# EAGLE board motherboard (EAGLE 6.1)
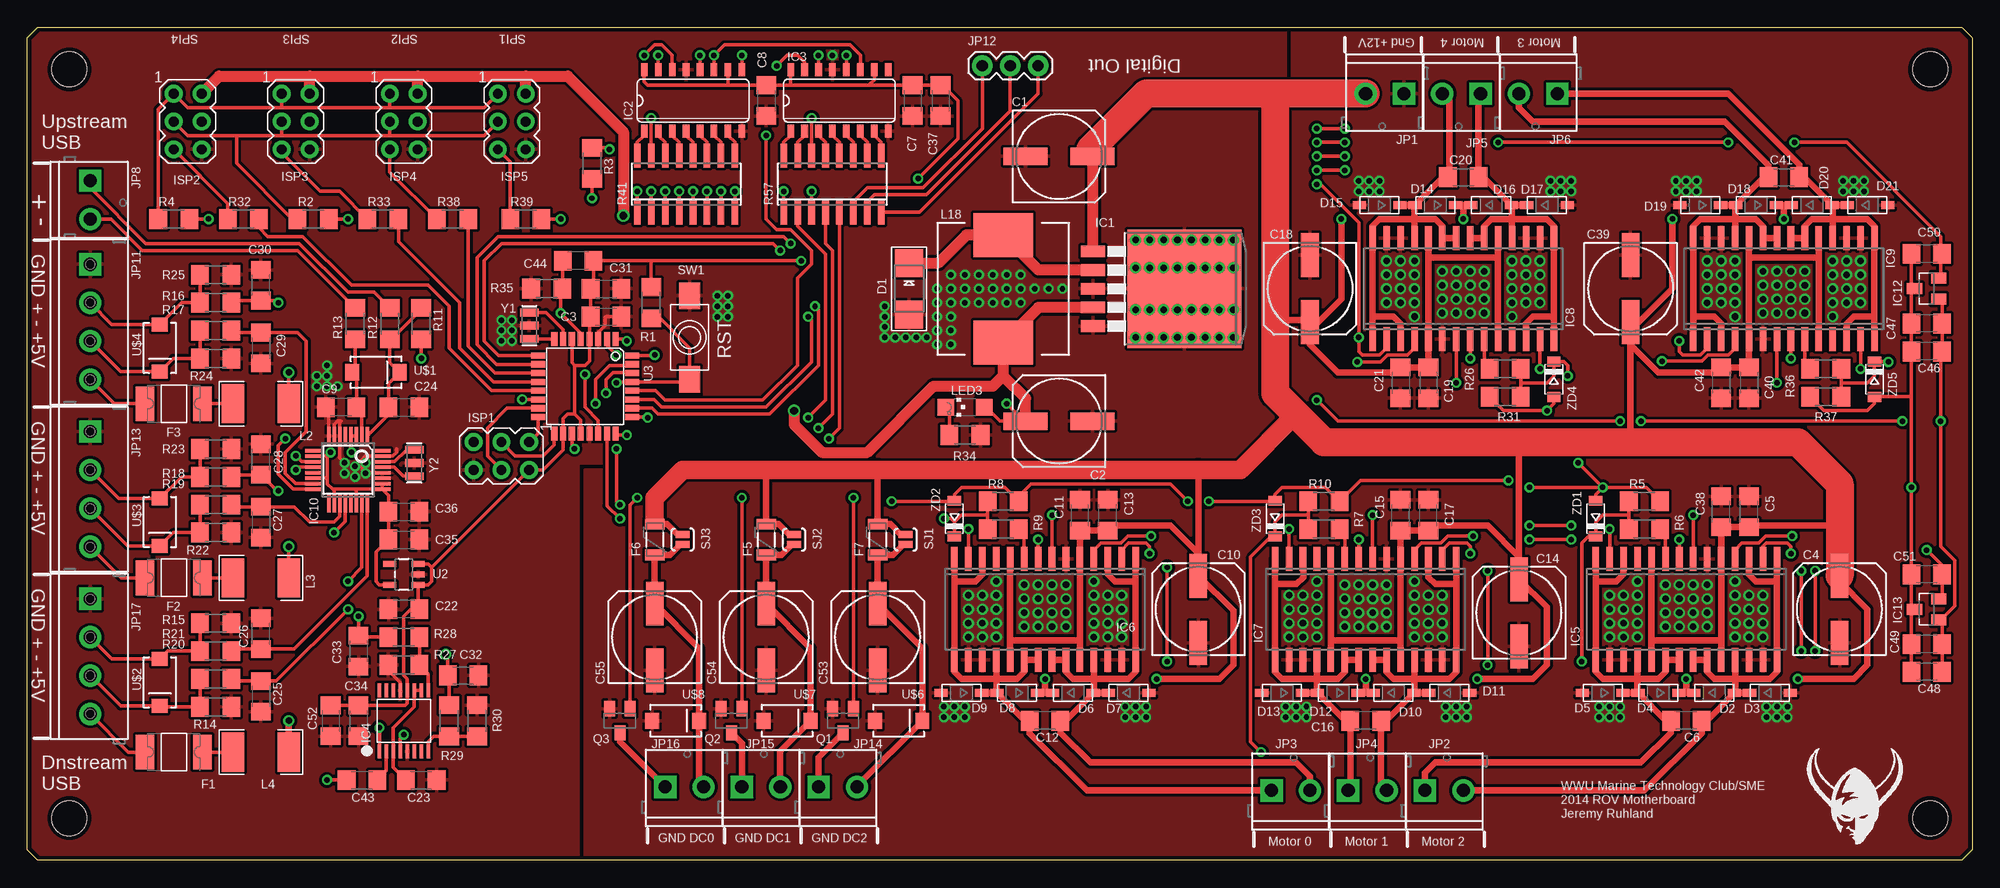
[diagram p0: board, top side]
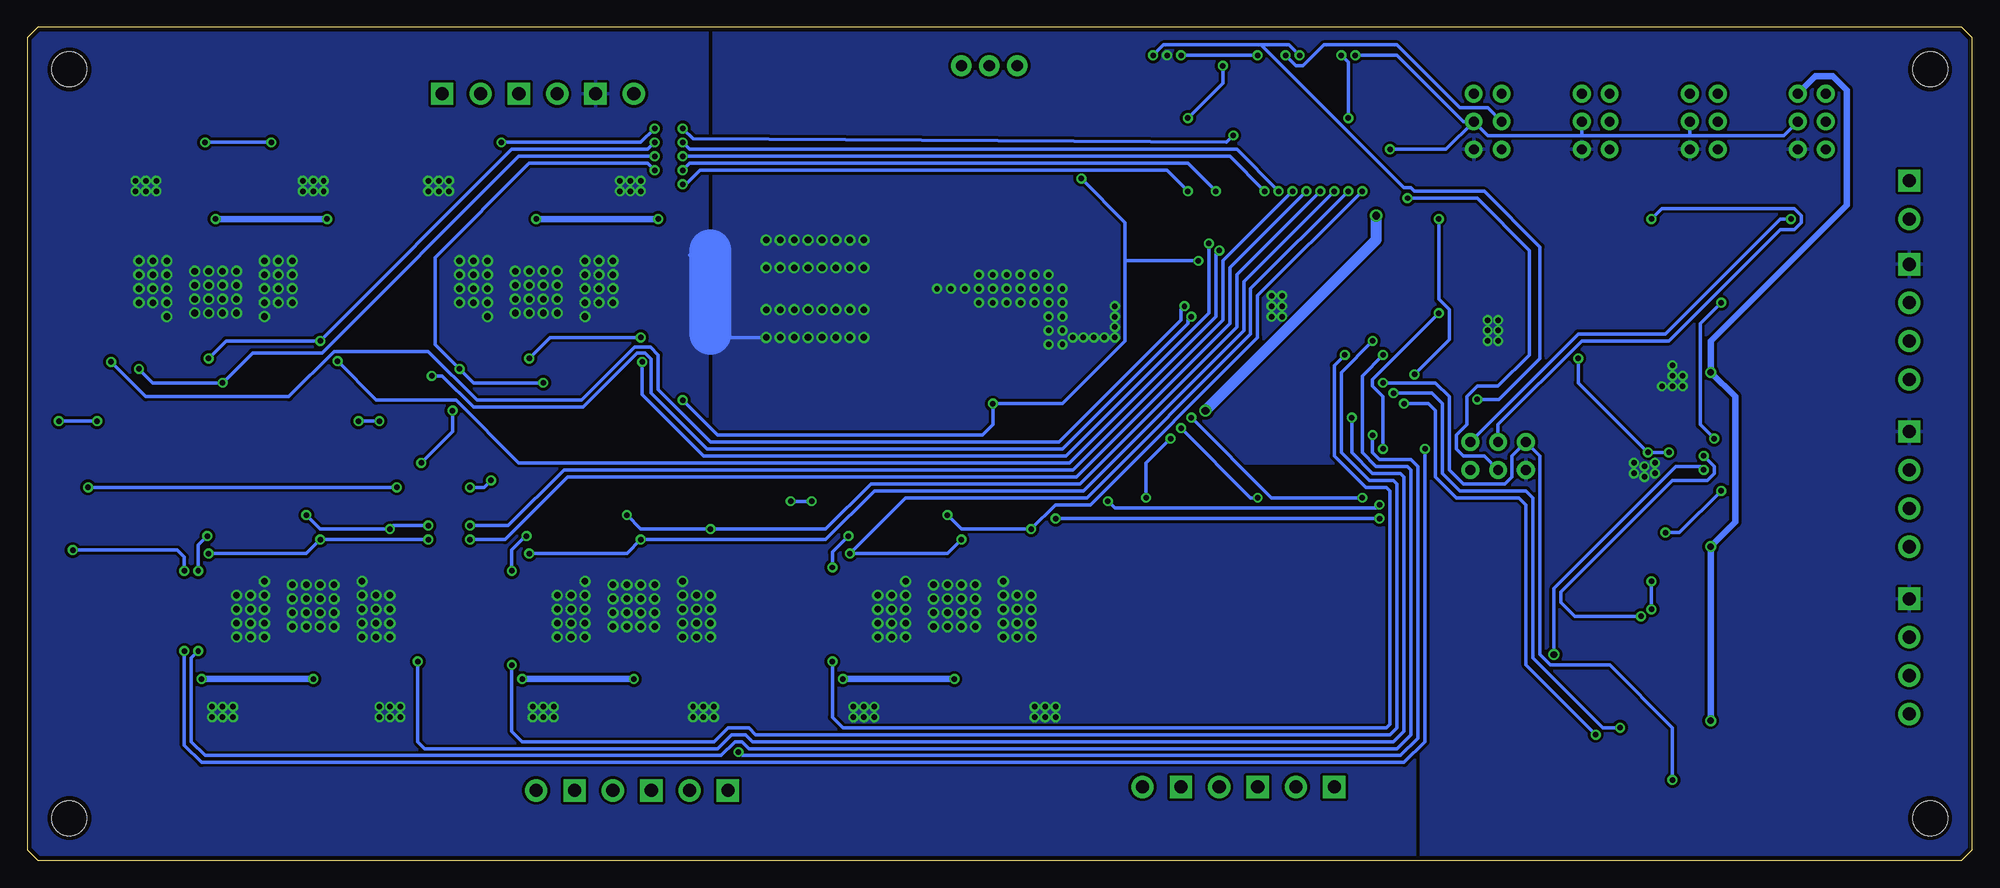
[diagram p1: board, bottom side, seen from below]

Size 177.16 x 75.88 mm. Coordinates in mm from the lower left corner, seen from the top.
Outline: 0,0.95 0,74.93 0.95,75.88 176.21,75.88 177.16,74.93 177.16,0.95 176.21,0 0.95,0 0,0.95
Copper layers (1*16): Top 0.035559375mm / dielectric 1.501140625mm / Bottom 0.035559375mm
Design rules: minimum track width 10mil, minimum drill 15mil, track to track 6mil, track to pad 6mil, pad to pad 6mil, via to via 6mil, smd to smd 6mil, copper to edge 15mil, drill to drill 8mil, minimum pad ring 10mil, minimum via ring 8mil, stop-mask expansion 4mil, vias tented up to drill 0mil, thermal gap 10mil
Holes 3.2 mm at 3.81,3.81 173.35,3.81 3.81,72.07 173.35,72.07

## Footprints (pad centres in the part's own frame; a part is rotated, then mirrored left to right if it is on the bottom)
153CLV-0807 = smd 4 x 1.6: + 3.05,0; - -3.05,0
C1206 = smd 1.6 x 1.8: 1 -1.4,0; 2 1.4,0
SMADIODE = smd 2.54 x 2.54: A 2.349,0; C -2.349,0
SOD-123 = smd 1.2 x 0.7: A 1.85,0; C -1.85,0
PTC1812L = smd 1.7 x 3.15: 1 -2.62,0; 2 2.62,0
PTC-1206 = smd 1 x 1.8: 1 -1.4,0; 2 1.4,0
TO263-5 = smd 1.067 x 2.159: 1 -3.404,-5.791; 2 -1.702,-5.791; 3 0,-5.791; 4 1.702,-5.791; 5 3.404,-5.791 | smd 10.8 x 10.41: 6 0,2.54
SO16 = smd 0.6 x 1.2: 1 -4.445,-2.8; 2 -3.175,-2.8; 3 -1.905,-2.8; 4 -0.635,-2.8; 5 0.635,-2.8; 6 1.905,-2.8; 7 3.175,-2.8; 8 4.445,-2.8; 9 4.445,2.8; 10 3.175,2.8; 11 1.905,2.8; 12 0.635,2.8; 13 -0.635,2.8; 14 -1.905,2.8; 15 -3.175,2.8; 16 -4.445,2.8
SSOP-16-FTDI = smd 0.32 x 1.26: 1 -2.223,-2.779; 2 -1.588,-2.779; 3 -0.953,-2.779; 4 -0.318,-2.779; 5 0.317,-2.779; 6 0.952,-2.779; 7 1.587,-2.779; 8 2.222,-2.779; 9 2.222,2.779; 10 1.587,2.779; 11 0.952,2.779; 12 0.317,2.779; 13 -0.318,2.779; 14 -0.953,2.779; 15 -1.588,2.779; 16 -2.223,2.779
SO-28 = smd 0.6 x 2.2: 1 -8.255,-4.6; 2 -6.985,-4.6; 3 -5.715,-4.6; 4 -4.445,-4.6; 5 -3.175,-4.6; 6 -1.905,-4.6; 7 -0.635,-4.6; 8 0.635,-4.6; 9 1.905,-4.6; 10 3.175,-4.6; 11 4.445,-4.6; 12 5.715,-4.6; 13 6.985,-4.6; 14 8.255,-4.6; 15 8.255,4.6; 16 6.985,4.6; 17 5.715,4.6; 18 4.445,4.6; 19 3.175,4.6; 20 1.905,4.6; 21 0.635,4.6; 22 -0.635,4.6; 23 -1.905,4.6; 24 -3.175,4.6; 25 -4.445,4.6; 26 -5.715,4.6; 27 -6.985,4.6; 28 -8.255,4.6
LQFP-32 = smd 0.3 x 1.6: 1 -1.75,-3.1; 2 -1.25,-3.1; 3 -0.75,-3.1; 4 -0.25,-3.1; 5 0.25,-3.1; 6 0.75,-3.1; 7 1.25,-3.1; 8 1.75,-3.1; 17 1.75,3.1; 18 1.25,3.1; 19 0.75,3.1; 20 0.25,3.1; 21 -0.25,3.1; 22 -0.75,3.1; 23 -1.25,3.1; 24 -1.75,3.1 | smd 1.6 x 0.3: 9 3.1,-1.75; 10 3.1,-1.25; 11 3.1,-0.75; 12 3.1,-0.25; 13 3.1,0.25; 14 3.1,0.75; 15 3.1,1.25; 16 3.1,1.75; 25 -3.1,1.75; 26 -3.1,1.25; 27 -3.1,0.75; 28 -3.1,0.25; 29 -3.1,-0.25; 30 -3.1,-0.75; 31 -3.1,-1.25; 32 -3.1,-1.75
SOT23 = smd 1 x 1.4: 1 -0.95,-1.1; 2 0.95,-1.1; 3 0,1.1
AVRISP = drill 0.9 pad 1.626: 1 -1.27,2.54; 2 1.27,2.54; 3 -1.27,0; 4 1.27,0; 5 -1.27,-2.54; 6 1.27,-2.54
SCREWTERMINAL-3.5MM-2 = drill 1.2 pad 2.032 square: 1 0,0 | drill 1.2 pad 2.032: 2 3.5,0
SCREWTERMINAL-3.5MM-4 = drill 1.2 pad 2.032 square: 1 0,0 | drill 1.2 pad 2.032: 2 3.5,0; 3 7,0; 4 10.5,0
1X03 = drill 1.016 pad 1.88: 1 0,0; 2 2.54,0; 3 5.08,0
INDUCTOR-1206 = smd 2.032 x 3.556: P$1 -2.54,0; P$2 2.54,0
CDRH125 = smd 5.4 x 4: 1 0,4.9; 2 0,-4.9
CHIPLED_1206 = smd 1.5 x 1.5: A 0,-1.75; C 0,1.75
R1206 = smd 1.6 x 1.803: 1 -1.422,0; 2 1.422,0
SO16' = smd 0.6 x 2.2: 1 -4.445,-2.6; 2 -3.175,-2.6; 3 -1.905,-2.6; 4 -0.635,-2.6; 5 0.635,-2.6; 6 1.905,-2.6; 7 3.175,-2.6; 8 4.445,-2.6; 9 4.445,2.6; 10 3.175,2.6; 11 1.905,2.6; 12 0.635,2.6; 13 -0.635,2.6; 14 -1.905,2.6; 15 -3.175,2.6; 16 -4.445,2.6
SJ_2S-NO = smd 0.635 x 1.27: 1 -0.45,0; 2 0.45,0
FSMSM = smd 2.413 x 1.905: A -3.81,0; B 3.81,0
SOT23-5 = smd 0.55 x 1.2: 1 -0.95,-1.3; 2 0,-1.3; 3 0.95,-1.3; 4 0.95,1.3; 5 -0.95,1.3
TQFP32-08 = smd 1.27 x 0.559: 1 -4.293,2.8; 2 -4.293,2; 3 -4.293,1.2; 4 -4.293,0.4; 5 -4.293,-0.4; 6 -4.293,-1.2; 7 -4.293,-2; 8 -4.293,-2.8; 17 4.293,-2.8; 18 4.293,-2; 19 4.293,-1.2; 20 4.293,-0.4; 21 4.293,0.4; 22 4.293,1.2; 23 4.293,2; 24 4.293,2.8 | smd 0.559 x 1.27: 9 -2.8,-4.293; 10 -2,-4.293; 11 -1.2,-4.293; 12 -0.4,-4.293; 13 0.4,-4.293; 14 1.2,-4.293; 15 2,-4.293; 16 2.8,-4.293; 25 2.8,4.293; 26 2,4.293; 27 1.2,4.293; 28 0.4,4.293; 29 -0.4,4.293; 30 -1.2,4.293; 31 -2,4.293; 32 -2.8,4.293
SMA-DIODE = smd 1.27 x 1.47: A -2.15,0; C 2.15,0
RESONATOR-SMD = smd 0.7 x 1.7: 1 -1.2,0; 2 0,0; 3 1.2,0
SOD-123' = smd 0.91 x 1.22: A 1.635,0; C -1.635,0

## Placement (x,y rotation side)
C1  1000uF  [153CLV-0807]  93.98,64.14 0 top
C2  1000uF  [153CLV-0807]  93.98,40.01 180 top
C3  0.1uF  [C1206]  52.7,49.53 0 top
C4  500uF  [153CLV-0807]  165.1,22.86 90 top
C5  0.1uF  [C1206]  156.84,31.75 90 top
C6  1uF  [C1206]  151.13,12.7 180 top
C7  0.1uF  [C1206]  80.64,69.22 270 top
C8  0.1uF  [C1206]  67.31,69.22 270 top
C9  47pF  [C1206]  28.57,41.27 180 top
C10  500uF  [153CLV-0807]  106.68,22.86 90 top
C11  0.1uF  [C1206]  95.89,31.43 90 top
C12  1uF  [C1206]  92.71,12.7 180 top
C13  4.7uF  [C1206]  98.42,31.43 90 top
C14  500uF  [153CLV-0807]  135.89,22.54 90 top
C15  0.1uF  [C1206]  125.09,31.43 90 top
C16  1uF  [C1206]  121.92,12.7 180 top
C17  4.7uF  [C1206]  127.64,31.43 90 top
C18  500uF  [153CLV-0807]  116.84,52.07 270 top
C19  0.1uF  [C1206]  127.64,43.5 270 top
C20  1uF  [C1206]  130.81,62.23 0 top
C21  4.7uF  [C1206]  125.09,43.5 270 top
C22  4.7uF  [C1206]  34.29,22.86 180 top
C23  0.1uF  [C1206]  35.88,7.3 0 top
C24  47pF  [C1206]  34.29,41.27 0 top
C25  47pF  [C1206]  21.27,14.92 270 top
C26  47pF  [C1206]  21.27,20.64 90 top
C27  47pF  [C1206]  21.27,30.8 270 top
C28  47pF  [C1206]  21.27,36.51 90 top
C29  47pF  [C1206]  21.27,46.67 270 top
C30  47pF  [C1206]  21.27,52.39 90 top
C31  4.7uF  [C1206]  52.7,52.07 0 top
C32  47pF  [C1206]  39.69,16.83 0 top
C33  47pF  [C1206]  30.16,19.05 270 top
C34  0.1uF  [C1206]  30.16,12.7 270 top
C35  4.7uF  [C1206]  34.29,29.21 0 top
C36  0.1uF  [C1206]  34.29,31.75 0 top
C37  4.7uF  [C1206]  83.19,69.22 270 top
C38  4.7uF  [C1206]  154.31,31.75 90 top
C39  500uF  [153CLV-0807]  146.05,52.07 270 top
C40  0.1uF  [C1206]  156.84,43.5 270 top
C41  1uF  [C1206]  160.02,62.23 0 top
C42  4.7uF  [C1206]  154.31,43.5 270 top
C43  0.1uF  [C1206]  30.48,7.3 0 top
C44  0.1uF  [C1206]  50.16,54.61 180 top
C46  4.7uF  [C1206]  173.04,46.35 180 top
C47  0.1uF  [C1206]  173.04,48.9 180 top
C48  4.7uF  [C1206]  173.04,17.14 180 top
C49  0.1uF  [C1206]  173.04,19.68 180 top
C50  0.1uF  [C1206]  173.04,55.24 180 top
C51  0.1uF  [C1206]  173.04,26.04 180 top
C52  4.7uF  [C1206]  27.62,12.7 270 top
C53  1000uF  [153CLV-0807]  77.47,20.32 90 top
C54  1000uF  [153CLV-0807]  67.31,20.32 90 top
C55  1000uF  [153CLV-0807]  57.15,20.32 90 top
D1  [SMADIODE]  80.33,52.07 270 top
D2  [SOD-123]  153.67,15.24 0 top
D3  [SOD-123]  158.75,15.24 0 top
D4  [SOD-123]  148.59,15.24 180 top
D5  [SOD-123]  143.51,15.24 180 top
D6  [SOD-123]  95.25,15.24 0 top
D7  [SOD-123]  100.33,15.24 0 top
D8  [SOD-123]  90.17,15.24 180 top
D9  [SOD-123]  85.09,15.24 180 top
D10  [SOD-123]  124.46,15.24 0 top
D11  [SOD-123]  129.54,15.24 0 top
D12  [SOD-123]  119.38,15.24 180 top
D13  [SOD-123]  114.3,15.24 180 top
D14  [SOD-123]  128.27,59.69 180 top
D15  [SOD-123]  123.19,59.69 180 top
D16  [SOD-123]  133.35,59.69 0 top
D17  [SOD-123]  138.43,59.69 0 top
D18  [SOD-123]  157.48,59.69 180 top
D19  [SOD-123]  152.4,59.69 180 top
D20  [SOD-123]  162.56,59.69 0 top
D21  [SOD-123]  167.64,59.69 0 top
F1  500mA  [PTC1812L]  13.34,9.84 180 top
F2  500mA  [PTC1812L]  13.34,25.72 180 top
F3  500mA  [PTC1812L]  13.34,41.59 180 top
F5  PTCSMD  [PTC-1206]  67.31,29.21 90 top
F6  PTCSMD  [PTC-1206]  57.15,29.21 90 top
F7  PTCSMD  [PTC-1206]  77.47,29.21 90 top
IC1  LM2576  [TO263-5]  102.87,52.07 270 top
IC2  74LS595D  [SO16]  60.64,69.22 0 top
IC3  74LS595D  [SO16]  73.98,69.22 0 top
IC4  IC_FT230X-SSOP-16  [SSOP-16-FTDI]  34.29,12.7 0 top
IC5  VN5772AK  [SO-28]  151.13,22.86 180 top
IC6  VN5772AK  [SO-28]  92.71,22.86 180 top
IC7  VN5772AK  [SO-28]  121.92,22.86 180 top
IC8  VN5772AK  [SO-28]  130.81,52.07 0 top
IC9  VN5772AK  [SO-28]  160.02,52.07 0 top
IC10  TUSB2046B  [LQFP-32]  29.21,35.56 180 top
IC12  LM50  [SOT23]  173.04,52.07 90 top
IC13  LM50  [SOT23]  173.04,22.86 90 top
ISP1  AVRISP-6  [AVRISP]  43.18,36.83 270 top
ISP2  AVRISP-6  [AVRISP]  14.61,67.31 0 top
ISP3  AVRISP-6  [AVRISP]  24.45,67.31 0 top
ISP4  AVRISP-6  [AVRISP]  34.29,67.31 0 top
ISP5  AVRISP-6  [AVRISP]  44.13,67.31 0 top
JP1  [SCREWTERMINAL-3.5MM-2]  125.41,69.85 180 top
JP2  [SCREWTERMINAL-3.5MM-2]  127.32,6.35 0 top
JP3  [SCREWTERMINAL-3.5MM-2]  113.35,6.35 0 top
JP4  [SCREWTERMINAL-3.5MM-2]  120.33,6.35 0 top
JP5  [SCREWTERMINAL-3.5MM-2]  132.4,69.85 180 top
JP6  [SCREWTERMINAL-3.5MM-2]  139.38,69.85 180 top
JP8  [SCREWTERMINAL-3.5MM-2]  5.71,61.91 270 top
JP11  [SCREWTERMINAL-3.5MM-4]  5.71,54.29 270 top
JP12  [1X03]  87,72.39 0 top
JP13  [SCREWTERMINAL-3.5MM-4]  5.71,39.05 270 top
JP14  [SCREWTERMINAL-3.5MM-2]  72.07,6.67 0 top
JP15  [SCREWTERMINAL-3.5MM-2]  65.09,6.67 0 top
JP16  [SCREWTERMINAL-3.5MM-2]  58.1,6.67 0 top
JP17  [SCREWTERMINAL-3.5MM-4]  5.71,23.81 270 top
L2  [INDUCTOR-1206]  21.27,41.59 180 top
L3  [INDUCTOR-1206]  21.27,25.72 180 top
L4  [INDUCTOR-1206]  21.27,9.84 180 top
L18  100uH  [CDRH125]  88.9,52.07 0 top
LED3  [CHIPLED_1206]  85.41,41.27 90 top
Q1  [SOT23]  74.3,12.7 180 top
Q2  [SOT23]  64.14,12.7 180 top
Q3  [SOT23]  53.98,12.7 180 top
R1  10k  [R1206]  56.83,50.8 90 top
R2  10k  [R1206]  26.04,58.42 0 top
R3  10k  [R1206]  51.44,63.5 270 top
R4  10k  [R1206]  13.34,58.42 0 top
R5  2k  [R1206]  147.32,32.7 0 top
R6  70  [R1206]  147.32,30.16 0 top
R7  70  [R1206]  118.11,30.16 0 top
R8  2k  [R1206]  88.9,32.7 0 top
R9  70  [R1206]  88.9,30.16 0 top
R10  2k  [R1206]  118.11,32.7 0 top
R11  1.5k  [R1206]  35.88,48.9 270 top
R12  27  [R1206]  33.02,48.9 90 top
R13  27  [R1206]  29.84,48.9 90 top
R14  15k  [R1206]  17.14,13.97 0 top
R15  15k  [R1206]  17.14,21.59 0 top
R16  27  [R1206]  17.14,50.8 0 top
R17  27  [R1206]  17.14,48.26 0 top
R18  27  [R1206]  17.14,34.92 0 top
R19  27  [R1206]  17.14,32.38 0 top
R20  27  [R1206]  17.14,16.51 0 top
R21  27  [R1206]  17.14,19.05 0 top
R22  15k  [R1206]  17.14,29.84 0 top
R23  15k  [R1206]  17.14,37.47 0 top
R24  15k  [R1206]  17.14,45.72 0 top
R25  15k  [R1206]  17.14,53.34 0 top
R26  70  [R1206]  134.62,44.77 180 top
R27  15k  [R1206]  34.29,17.78 0 top
R28  27  [R1206]  34.29,20.32 0 top
R29  27  [R1206]  38.42,12.7 270 top
R30  15k  [R1206]  40.96,12.7 270 top
R31  2k  [R1206]  134.62,42.23 180 top
R32  10k  [R1206]  19.68,58.42 0 top
R33  10k  [R1206]  32.38,58.42 0 top
R34  500  [R1206]  85.41,38.73 0 top
R35  0  [R1206]  47.31,52.07 180 top
R36  70  [R1206]  163.83,44.77 180 top
R37  2k  [R1206]  163.83,42.23 180 top
R38  10k  [R1206]  38.73,58.42 0 top
R39  10k  [R1206]  45.4,58.42 0 top
R41  10k  [SO16']  60.01,61.59 0 top
R57  10k  [SO16']  73.34,61.59 0 top
SJ1  JMP  [SJ_2S-NO]  80.01,29.21 90 top
SJ2  JMP  [SJ_2S-NO]  69.85,29.21 90 top
SJ3  JMP  [SJ_2S-NO]  59.69,29.21 90 top
SW1  [FSMSM]  60.33,47.62 270 top
U2  NCP4625  [SOT23-5]  34.29,26.04 90 top
U3  ATMEGA168  [TQFP32-08]  50.8,43.18 270 top
U$1  TVS  [SMA-DIODE]  31.75,44.45 0 top
U$2  TVS  [SMA-DIODE]  12.06,16.19 270 top
U$3  TVS  [SMA-DIODE]  12.06,30.8 270 top
U$4  TVS  [SMA-DIODE]  12.06,46.67 270 top
U$6  TVS  [SMA-DIODE]  79.38,12.7 0 top
U$7  TVS  [SMA-DIODE]  69.22,12.7 0 top
U$8  TVS  [SMA-DIODE]  59.05,12.7 0 top
Y1  16Mhz  [RESONATOR-SMD]  45.72,48.7 270 top
Y2  6MHz  [RESONATOR-SMD]  35.24,36.2 90 top
ZD1  5V  [SOD-123']  142.88,31.11 90 top
ZD2  5V  [SOD-123']  84.45,31.11 90 top
ZD3  5V  [SOD-123']  113.67,31.11 90 top
ZD4  5V  [SOD-123']  139.06,43.81 270 top
ZD5  5V  [SOD-123']  168.28,43.81 270 top

## Library data of the parts
C1-C44 C46-C55 D1-D21 ISP1-ISP5 LED3 Q1-Q3 R1-R39 = adafruit
F1-F3 IC4 ZD1-ZD5 = dp_devices
F5-F7 IC2 IC3 JP1-JP6 JP8 JP11-JP17 L2-L4 L18 SJ1-SJ3 U2 U3 U$1-U$4 U$6-U$8 Y1 Y2 = sparkfun
IC1 IC12 IC13 = linear
IC5-IC10 = rov_club
R41 R57 = resistor-bourns; OC_FARNELL: unknown; OC_NEWARK: unknown
SW1 = alcoswitch

## Nets
0HA: IC6.2 IC6.8 R41.2
0HB: IC6.7 IC6.13 R41.1
0SENSE: R8.1 R9.1 U3.23 ZD2.C
0STAT: IC6.4 U3.32
1HA: IC7.2 IC7.8 R41.3
1HB: IC7.7 IC7.13 R41.4
1SENSE: R7.1 R10.1 U3.24 ZD3.C
1STAT: IC7.4 U3.1
2HA: IC5.2 IC5.8 R41.5
2HB: IC5.7 IC5.13 R41.6
2SENSE: R5.1 R6.1 U3.25 ZD1.C
2STAT: IC5.4 U3.2
3.3V: C35.1 C36.1 IC10.3 IC10.4 IC10.10 IC10.14 IC10.18 IC10.22 IC10.25 IC10.26 R11.2 U2.5
3HA: IC9.2 IC9.8 R41.7
3HB: IC9.7 IC9.13 R41.8
3SENSE: R36.1 R37.1 U3.26 ZD5.C
3STAT: IC9.4 U3.9
4HA: IC8.2 IC8.8 R57.3
4HB: IC8.7 IC8.13 R57.1
4SENSE: R26.1 R31.1 U3.27 ZD4.C
4STAT: IC8.4 U3.10
!EN1: R39.2 U3.22
!EN2: R38.2 U3.11
!EN3: R33.2 U3.12
!EN4: R32.2 U3.13
!RST: C43.1 ISP1.5 R1.1 SW1.B U3.29
+5V: C2.+ C3.1 C7.1 C8.1 C22.1 C31.1 C34.1 C37.1 C44.1 C46.1 C47.1 C48.1 C49.1 C52.1 IC1.4 IC2.10 IC2.16 IC3.10 IC3.16 IC4.12 IC12.1 IC13.1 ISP1.2 ISP2.2 ISP3.2 ISP4.2 ISP5.2 L2.P$1 L3.P$1 L4.P$1 L18.2 LED3.A R1.2 U2.1 U2.3 U3.4 U3.6 U3.18 U3.20
+12V: C1.+ C4.+ C5.1 C10.+ C11.1 C13.1 C14.+ C15.1 C17.1 C18.+ C19.1 C21.1 C38.1 C39.+ C40.1 C42.1 D2.C D4.C D6.C D8.C D10.C D12.C D14.C D16.C D18.C D20.C F5.2 F6.2 F7.2 IC1.1 IC5.5 IC5.10 IC5.19 IC5.24 IC6.5 IC6.10 IC6.19 IC6.24 IC7.5 IC7.10 IC7.19 IC7.24 IC8.5 IC8.10 IC8.19 IC8.24 IC9.5 IC9.10 IC9.19 IC9.24 JP1.2 SJ1.2 SJ2.2 SJ3.2
AGND: C44.2 C46.2 C47.2 C48.2 C49.2 C50.2 C51.2 IC12.3 IC13.3 R5.2 R8.2 R10.2 R31.2 R35.1 R37.2 U3.5 ZD1.A ZD2.A ZD3.A ZD4.A ZD5.A
D1+: C32.1 IC10.12 R29.1
D1-: C33.1 IC10.11 R28.1
GND: C1.- C2.- C3.2 C4.- C5.2 C7.2 C8.2 C9.2 C10.- C11.2 C13.2 C14.- C15.2 C17.2 C18.- C19.2 C21.2 C22.2 C23.2 C24.2 C25.2 C26.2 C27.2 C28.2 C29.2 C30.2 C31.2 C32.2 C33.2 C34.2 C35.2 C36.2 C37.2 C38.2 C39.- C40.2 C42.2 C52.2 C53.- C54.- C55.- D1.A D3.A D5.A D7.A D9.A D11.A D13.A D15.A D17.A D19.A D21.A IC1.3 IC1.5 IC1.6 IC2.8 IC2.13 IC3.8 IC3.13 IC4.5 IC4.13 IC5.6 IC5.16 IC5.17 IC5.26 IC5.27 IC6.6 IC6.16 IC6.17 IC6.26 IC6.27 IC7.6 IC7.16 IC7.17 IC7.26 IC7.27 IC8.6 IC8.16 IC8.17 IC8.26 IC8.27 IC9.6 IC9.16 IC9.17 IC9.26 IC9.27 IC10.6 IC10.7 IC10.8 IC10.27 IC10.28 IC10.31 ISP1.6 ISP2.6 ISP3.6 ISP4.6 ISP5.6 JP1.1 JP11.1 JP13.1 JP17.1 Q1.2 Q2.2 Q3.2 R14.2 R15.2 R22.2 R23.2 R24.2 R25.2 R27.1 R30.1 R34.2 R35.2 SW1.A U2.2 U3.3 U3.21 U$6.A U$7.A U$8.A Y1.2 Y2.2
ISP-MISO: ISP1.1 R4.2 U3.16
ISP-MOSI: ISP1.4 R3.2 U3.15
ISP-SCK: ISP1.3 R2.2 U3.17
LATCH: IC2.12 IC3.12 U3.14
MISO: ISP2.1 ISP3.1 ISP4.1 ISP5.1 R4.1
MOSI: IC2.14 ISP2.4 ISP3.4 ISP4.4 ISP5.4 R3.1
N$1: D1.C IC1.2 L18.1
N$2: U3.8 Y1.3
N$3: C12.2 D8.A D9.C IC6.12 IC6.14 IC6.15 IC6.18 IC6.20 IC6.21 JP3.1
N$4: U3.7 Y1.1
N$5: C12.1 D6.A D7.C IC6.1 IC6.3 IC6.22 IC6.23 IC6.25 IC6.28 JP3.2
N$6: IC2.9 IC3.14
N$7: C9.1 IC10.2 R13.1 U$1.A
N$8: C16.2 D12.A D13.C IC7.12 IC7.14 IC7.15 IC7.18 IC7.20 IC7.21 JP4.1
N$9: C16.1 D10.A D11.C IC7.1 IC7.3 IC7.22 IC7.23 IC7.25 IC7.28 JP4.2
N$10: C20.2 D16.A D17.C IC8.12 IC8.14 IC8.15 IC8.18 IC8.20 IC8.21 JP5.1
N$11: C20.1 D14.A D15.C IC8.1 IC8.3 IC8.22 IC8.23 IC8.25 IC8.28 JP5.2
N$12: C41.2 D20.A D21.C IC9.12 IC9.14 IC9.15 IC9.18 IC9.20 IC9.21 JP6.1
N$13: C6.2 D4.A D5.C IC5.12 IC5.14 IC5.15 IC5.18 IC5.20 IC5.21 JP2.1
N$14: C41.1 D18.A D19.C IC9.1 IC9.3 IC9.22 IC9.23 IC9.25 IC9.28 JP6.2
N$15: IC3.7 R57.9
N$16: C43.2 IC4.2
N$17: IC3.6 R57.10
N$18: IC3.5 R57.11
N$19: C24.1 IC10.1 R11.1 R12.1 U$1.C
N$21: JP17.2 R15.1 R21.1 U$2.A
N$22: IC10.30 Y2.3
N$23: IC10.29 Y2.1
N$24: JP17.3 R14.1 R20.1 U$2.C
N$25: JP13.3 R19.1 R22.1 U$3.C
N$26: C30.1 IC10.16 R16.2
N$27: C29.1 IC10.15 R17.2
N$28: C28.1 IC10.20 R18.2
N$29: C27.1 IC10.19 R19.2
N$30: C25.1 IC10.23 R20.2
N$31: C26.1 IC10.24 R21.2
N$32: JP13.2 R18.1 R23.1 U$3.A
N$33: JP11.3 R17.1 R24.1 U$4.C
N$34: JP11.2 R16.1 R25.1 U$4.A
N$35: F1.2 JP17.4
N$36: F2.2 JP13.4
N$37: F3.2 JP11.4
N$38: C23.1 IC4.3 IC4.10 IC4.11
N$39: IC4.9 R27.2 R28.2
N$40: IC4.8 R29.2 R30.2
N$41: F3.1 L2.P$2
N$42: F2.1 L3.P$2
N$43: JP14.1 Q1.3
N$44: JP8.1 R12.2
N$45: JP8.2 R13.2
N$46: LED3.C R34.1
N$47: JP15.1 Q2.3
N$48: JP16.1 Q3.3
N$49: F1.1 L4.P$2
N$50: C55.+ F6.1 JP16.2 SJ3.1 U$8.C
N$51: ISP2.5 R32.1
N$52: ISP3.5 R33.1
N$53: ISP4.5 R38.1
N$54: C54.+ F5.1 JP15.2 SJ2.1 U$7.C
N$55: C53.+ F7.1 JP14.2 SJ1.1 U$6.C
N$56: IC3.4 R57.12
N$58: ISP5.5 R39.1
N$59: C6.1 D2.A D3.C IC5.1 IC5.3 IC5.22 IC5.23 IC5.25 IC5.28 JP2.2
N$60: IC3.3 R57.13
N$61: IC3.2 R57.15
N$62: IC3.1 R57.16
N$63: IC3.15 R57.14
N$64: IC2.7 R41.9
N$65: IC2.6 R41.10
N$66: IC2.5 R41.11
N$67: IC2.4 R41.12
N$68: IC2.3 R41.13
N$69: IC2.2 R41.14
N$70: IC2.1 R41.16
N$71: IC2.15 R41.15
N$76: IC5.9 R6.2
N$77: IC7.9 R7.2
N$78: IC6.9 R9.2
N$79: IC9.9 R36.2
N$80: IC8.9 R26.2
RXD: IC4.1 U3.30
SCK: IC2.11 IC3.11 ISP2.3 ISP3.3 ISP4.3 ISP5.3 R2.1
SW0: Q3.1 R57.2
SW1: Q2.1 R57.4
SW2: Q1.1 R57.5
SW3: JP12.1 R57.6
SW4: JP12.2 R57.7
SW5: JP12.3 R57.8
TEMP0: C50.1 IC12.2 U3.28
TEMP1: C51.1 IC13.2 U3.19
TXD: IC4.4 U3.31

## Tracks (layer width: path | path; a pad name or v marks a point on that pad's centre or on a via)
0HA  (via drill 0.5)
  Top 0.305: IC6.8 v92.08,29.21 | IC6.2 99.69,28.26 100.33,28.89 101.92,28.89 102.23,28.57 v102.23,27.94 | R41.2 v56.83,60.96
  Bottom 0.305: v92.08,29.21 93.34,27.94 v102.23,27.94 97.16,33.02 80.64,33.02 65.72,47.94 65.72,52.07 v56.83,60.96
0HB  (via drill 0.5)
  Top 0.305: IC6.13 v85.72,30.16 | v93.34,31.43 IC6.7 | R41.1 v55.56,60.96
  Bottom 0.305: v93.34,31.43 92.08,30.16 v85.72,30.16 83.5,32.38 80.33,32.38 65.09,47.62 65.09,51.44 v55.56,60.96
0SENSE  (via drill 0.5)
  Top 0.305: R9.1 87.48,31.43 | 87.48,31.43 R8.1 | 84.45,30.8 85.09,31.43 87.48,31.43 | 84.45,30.8 ZD2.C | U3.23 52.8,32.29 v53.98,31.11 | v83.5,31.11 84.14,31.11 84.45,30.8
  Bottom 0.305: v83.5,31.11 v53.98,31.11
0STAT  (via drill 0.5)
  Top 0.305: IC6.4 97.16,28.26 97.79,28.89 99.63,28.89 100.27,29.53 v102.36,29.53 | U3.32 57.09,45.98 v57.15,46.04 | v103.82,18.1 v103.82,26.67
  Bottom 0.305: v102.36,29.53 103.82,28.07 v103.82,26.67 | v103.82,18.1 103.82,13.02 102.87,12.06 53.34,12.06 53.02,12.38 53.02,33.66 53.34,33.97 55.24,33.97 58.1,36.83 58.1,45.09 v57.15,46.04
1HA  (via drill 0.5)
  Top 0.305: IC7.2 128.91,28.26 129.54,28.89 131.13,28.89 131.44,28.57 v131.44,27.94 | IC7.8 v121.28,29.21 | R41.3 v58.1,60.96
  Bottom 0.305: v131.44,27.94 122.56,27.94 v121.28,29.21 104.46,29.21 100.01,33.66 80.96,33.66 66.36,48.26 66.36,52.7 v58.1,60.96
1HB  (via drill 0.5)
  Top 0.305: IC7.13 v114.94,30.16 | v122.56,31.43 IC7.7 | R41.4 v59.37,60.96
  Bottom 0.305: v122.56,31.43 121.28,30.16 v114.94,30.16 104.46,30.16 100.33,34.29 81.28,34.29 66.99,48.58 66.99,53.34 v59.37,60.96
1SENSE  (via drill 0.5)
  Top 0.305: R7.1 116.69,31.43 | 116.69,31.43 R10.1 | 116.69,31.43 114.3,31.43 113.67,30.8 ZD3.C 113.3,29.48 111.44,27.62 111.44,10.79 v112.39,9.84 | U3.24 53.75,38.73 v54.61,38.73
  Bottom 0.305: v54.61,38.73 54.61,37.15 53.98,36.51 51.12,36.51 50.48,35.88 50.48,11.11 52.07,9.53 112.08,9.53 v112.39,9.84
1STAT  (via drill 0.5)
  Top 0.305: IC7.4 126.36,28.26 127,28.89 128.78,28.89 129.41,29.53 v131.7,29.53 | U3.1 54.45,47.47 v54.61,47.31 | v133.03,17.78 v133.03,26.35
  Bottom 0.305: v133.03,26.35 133.03,28.26 131.76,29.53 v131.7,29.53 | v133.03,17.78 133.03,11.75 132.08,10.79 114.62,10.79 113.35,12.06 111.44,12.06 110.81,11.43 53.02,11.43 52.39,12.06 52.39,34.29 52.7,34.61 54.93,34.61 57.47,37.15 57.47,44.45 v54.61,47.31
2HA  (via drill 0.5)
  Top 0.305: IC5.8 v150.5,29.21 | IC5.2 158.12,28.57 158.43,28.89 160.34,28.89 160.66,28.57 v160.66,27.94 | R41.5 v60.64,60.96 | v136.84,29.21 v140.65,29.21
  Bottom 0.305: v160.66,27.94 151.76,27.94 v150.5,29.21 v140.65,29.21 | v60.64,60.96 67.63,53.98 67.63,48.9 81.6,34.92 127.95,34.92 133.67,29.21 v136.84,29.21
2HB  (via drill 0.5)
  Top 0.305: IC5.13 v144.15,30.16 | IC5.7 v151.76,31.43 | R41.6 v61.91,60.96 | v136.84,30.48 v140.65,30.48
  Bottom 0.305: v151.76,31.43 150.5,30.16 v144.15,30.16 143.83,30.48 v140.65,30.48 | v61.91,60.96 68.26,54.61 68.26,49.21 81.92,35.56 128.27,35.56 133.35,30.48 v136.84,30.48
2SENSE  (via drill 0.5)
  Top 0.305: R6.1 145.9,31.43 | 145.9,31.43 145.9,32.55 146.05,32.7 R5.1 | ZD1.C 142.88,29.53 | 145.9,31.43 143.51,31.43 142.88,30.8 142.88,29.53 | 142.88,29.53 142.24,29.53 141.6,28.89 141.6,28.26 v141.6,18.1 | U3.25 56.46,40.38 v56.52,40.32
  Bottom 0.305: v141.6,18.1 141.6,10.79 140.97,10.16 114.3,10.16 113.03,11.43 111.76,11.43 111.12,10.79 52.7,10.79 51.75,11.75 51.75,34.92 52.07,35.24 54.61,35.24 56.52,37.15 v56.52,40.32
2STAT  (via drill 0.5)
  Top 0.305: IC5.4 155.57,28.26 156.21,28.89 157.73,28.89 158.37,29.53 v160.78,29.53 | v53.66,46.04 52.8,46.9 U3.2 | v161.61,19.05 v161.61,26.35
  Bottom 0.305: v160.78,29.53 161.61,28.7 v161.61,26.35 | v53.66,46.04 55.56,44.13 55.56,37.15 54.29,35.88 51.44,35.88 51.12,35.56 51.12,11.43 52.39,10.16 111.44,10.16 112.08,10.79 112.71,10.79 113.98,9.53 160.97,9.53 162.24,10.79 162.24,18.41 v161.61,19.05
3.3V  (via drill 0.5)
  Top 0.305: IC10.26 IC10.25 | IC10.3 IC10.4 29.46,37.22 v29.53,37.15 | IC10.25 32.89,33.23 C36.1 C35.1 31.75,28.07 31.75,25.4 32.06,25.09 U2.5 | IC10.25 29.84,33.81 | 29.84,33.81 27.94,33.81 | 27.94,33.81 27.79,33.81 27.3,34.29 27.3,34.92 | 27.3,34.92 27.3,36.83 | IC10.14 27.19,34.81 27.3,34.92 | IC10.18 27.96,33.79 27.94,33.81 | IC10.22 29.96,33.7 29.84,33.81 | 27.3,36.83 v27.62,37.15 | IC10.10 27.29,36.81 27.3,36.83 | R11.2 v35.88,45.72
  Bottom 0.305: v27.62,37.15 v29.53,37.15 35.88,43.5 v35.88,45.72
3HA  (via drill 0.5)
  Top 0.305: v160.66,45.72 IC9.8 | IC9.2 153.03,46.67 152.4,46.04 150.81,46.04 150.5,46.35 v150.5,47.31 | R41.7 v63.18,60.96 | v117.47,65.41 v120.02,65.41
  Bottom 0.305: v160.66,45.72 159.07,47.31 v150.5,47.31 133.03,64.77 120.65,64.77 v120.02,65.41 | v63.18,60.96 66.99,64.77 116.84,64.77 v117.47,65.41
3HB  (via drill 0.5)
  Top 0.305: IC9.13 v167,44.77 | IC9.7 v159.38,43.5 | R41.8 v64.45,60.96 | v117.47,64.14 v120.02,64.14
  Bottom 0.305: v167,44.77 165.74,43.5 v159.38,43.5 156.66,46.23 150.3,46.23 132.4,64.14 v120.02,64.14 | v64.45,60.96 67.63,64.14 v117.47,64.14
3SENSE  (via drill 0.5)
  Top 0.305: R36.1 165.25,43.5 | 165.25,43.5 R37.1 | 165.25,43.5 167.64,43.5 168.28,44.13 ZD5.C 169.5,45.45 v169.54,45.4 | U3.26 56.93,41.18 57.47,40.64 67.63,40.64 72.07,45.09 72.07,50.16 v71.75,50.48
  Bottom 0.305: v71.75,50.48 72.07,50.16 72.07,49.21 83.19,38.1 114.94,38.1 119.7,42.86 119.7,46.04 120.4,46.74 121.86,46.74 126.68,41.91 136.21,41.91 140.65,46.35 149.22,46.35 153.35,42.23 166.37,42.23 v169.54,45.4
3STAT  (via drill 0.5)
  Top 0.305: IC9.4 155.57,46.67 154.94,46.04 153.1,46.04 152.53,45.47 v148.91,45.47 | U3.9 42.92,45.98 41.59,47.31 41.59,54.61 43.18,56.2 67.94,56.2 v68.58,55.56
  Bottom 0.305: v68.58,55.56 68.9,55.24 68.9,49.53 82.23,36.2 132.4,36.2 138.11,41.91 145.41,41.91 v148.91,45.47
4HA  (via drill 0.5)
  Top 0.305: IC8.8 v131.44,45.72 | IC8.2 123.83,46.67 123.19,46.04 121.6,46.04 121.28,46.35 v121.28,47.62 121.28,58.1 117.79,61.59 v117.47,61.59 | R57.3 v71.44,60.96
  Top 0.406: IC8.2 123.83,47.62
  Bottom 0.305: v117.47,61.59 117.16,61.59 115.89,62.87 73.34,62.87 v71.44,60.96 | v121.28,47.62 129.54,47.62 v131.44,45.72
4HB  (via drill 0.5)
  Top 0.305: IC8.13 v137.79,44.77 | R57.1 v68.9,60.96 | IC8.7 v130.18,43.5 | v117.47,62.87 v120.02,62.87
  Bottom 0.305: v130.18,43.5 136.53,43.5 v137.79,44.77 140.02,46.99 140.02,54.93 131.44,63.5 120.65,63.5 v120.02,62.87 | v117.47,62.87 116.84,63.5 71.44,63.5 v68.9,60.96
4SENSE  (via drill 0.5)
  Top 0.305: R26.1 136.04,43.5 | 136.04,43.5 R31.1 | 136.04,43.5 138.43,43.5 139.06,44.13 ZD4.C 139.97,45.45 140.34,45.09 v140.34,44.13 | U3.27 57.08,41.98 57.78,41.27 67.31,41.27 71.44,45.4 71.44,49.21 v71.12,49.53
  Bottom 0.305: v71.12,49.53 71.44,49.21 71.44,48.9 82.87,37.47 115.25,37.47 120.33,42.55 120.33,45.66 120.9,46.23 121.6,46.23 126.56,41.27 136.53,41.27 139.38,44.13 v140.34,44.13
4STAT  (via drill 0.5)
  Top 0.305: IC8.4 126.36,46.67 125.73,46.04 123.89,46.04 123.25,45.4 v121.16,45.4 | U3.10 42.77,45.18 40.96,46.99 40.96,54.93 42.86,56.83 68.9,56.83 v69.53,56.2
  Bottom 0.305: v69.53,56.2 69.53,49.85 82.55,36.83 115.57,36.83 121.16,42.42 v121.16,45.4
!EN1  (via drill 0.5)
  Top 0.305: U3.22 52,40.08 50.8,41.27 v50.8,44.26 | 46.99,58.26 R39.2 v48.58,58.42
  Bottom 0.305: v50.8,44.26 47.62,47.43 47.62,50.16 48.58,51.12 v48.58,58.42
!EN2
  Top 0.305: U3.11 42.62,44.38 40.16,46.84 R38.2
!EN3
  Top 0.305: R33.2 33.81,56.36 39.37,50.8 39.37,46.67 42.46,43.58 U3.12
!EN4
  Top 0.305: R32.2 21.11,57.63 21.91,56.83 25.08,56.83 29.53,52.39 36.51,52.39 38.42,50.48 38.42,46.67 42.31,42.78 U3.13
!RST  (via drill 0.5)
  Top 0.305: R1.1 57.62,49.38 60.33,46.67 SW1.B 60.09,43.58 U3.29 53.74,43.58 v53.66,43.5 | v27.3,7.3 C43.1
  Bottom 0.305: v27.3,7.3 27.3,12.06 33.02,17.78 38.42,17.78 39.37,18.73 39.37,36.83 ISP1.5 41.91,36.83 41.91,34.92 42.55,34.29 46.35,34.29 47.62,35.56 47.62,42.23 48.9,43.5 v53.66,43.5
+5V  (via drill 0.5, 0.6, 0.7)
  Top 0.305: U2.3 36.52,26.98 36.83,26.67 | 36.83,26.67 36.83,25.4 36.52,25.09 U2.1 35.59,22.96 C22.1 34.92,22.86 34.29,22.23 34.29,16.83 34.61,16.51 IC4.12 34.61,14.29 34.42,14.1 C34.1 C52.1 | C48.1 C49.1 174.44,21.61 IC13.1 174.31,21.91 175.58,23.18 175.58,27.3 174.31,28.57 v174.31,40.01 174.31,46.23 C46.1 | C46.1 C47.1 174.44,50.82 IC12.1 | L3.P$1 v23.81,28.57 | L2.P$1 v23.81,44.45 | 63.82,70.61 56.52,70.61 56.2,70.93 IC2.16 | 63.82,70.61 C8.1 69.53,70.61 | IC2.10 63.82,70.61 | 69.53,70.61 76.65,70.61 | 76.65,70.61 77.15,71.12 IC3.10 | IC3.16 69.53,70.61 | LED3.A 87.31,41.27 88.58,40.01 90.81,40.01 | 90.81,40.01 C2.+ | U3.6 49.6,45.33 49.85,45.09 | 49.85,45.09 50.8,45.09 51.2,45.48 U3.4 51.2,49.42 C3.1 C31.1 51.3,52.58 51.56,52.84 C44.1 56.83,54.61 | 49.85,45.09 49.85,40.64 | 49.85,40.64 50.4,40.09 U3.20 | 49.85,40.64 49.21,40.64 48.8,40.23 U3.18 48.8,37.37 46.99,35.56 ISP1.2 36.83,26.67 | 56.83,52.39 R1.2 56.83,54.61 | 76.65,70.61 C7.1 C37.1 83.37,70.61 84.77,69.22 84.77,65.72 v81.15,62.1 | v89.22,41.59 90.81,40.01 | 56.83,54.61 v70.48,54.61 | v117.47,41.91 119.38,40.01 v145.1,40.01 | v147,40.01 v170.81,40.01 | 174.44,46.23 174.31,46.35 C46.1
  Top 0.61: L4.P$1 v23.81,12.7
  Top 1.016: 88.9,44.13 L18.2 92.1,50.37 IC1.4 | 88.9,44.13 90.93,42.1 C2.+ | 25.72,71.44 17.46,71.44 ISP2.2 | 25.72,71.44 35.56,71.44 | 35.56,71.44 45.4,71.44 | ISP3.2 25.72,71.44 | ISP4.2 35.56,71.44 | ISP5.2 45.4,71.44 | 45.4,71.44 49.21,71.44 54.29,66.36 v54.29,58.74 | v69.85,40.96 69.85,39.69 72.39,37.15 76.52,37.15 82.55,43.18 87.95,43.18 88.9,44.13
  Bottom 0.305: v81.15,62.1 77.15,58.1 77.15,54.61 | 77.15,54.61 77.15,47.31 82.87,41.59 v89.22,41.59 89.22,39.69 90.17,38.73 114.3,38.73 v117.47,41.91 | v70.48,54.61 77.15,54.61 | v145.1,40.01 v147,40.01 | v170.81,40.01 v174.31,40.01
  Bottom 0.61: v23.81,12.7 v23.81,28.57 21.59,30.8 21.59,42.23 v23.81,44.45 23.81,47.31 11.43,59.69 11.43,70.17 12.7,71.44 14.29,71.44 ISP2.2
  Bottom 1.016: v54.29,58.74 54.29,56.52 v69.85,40.96
+12V  (via drill 0.5)
  Top 0.305: C1.+ 97.03,64.58 96.84,64.77 | 165.1,25.4 C4.+
  Top 0.61: IC5.19 147.96,20 | 147.96,20 IC5.10 | 154.31,20 IC5.5 154.31,30.16 153.99,30.48 C38.1 C5.1 156.53,30.48 165.1,30.48 | 95.89,20 IC6.5 C11.1 C13.1 97.79,30.48 104.14,30.48 106.68,27.94 | IC6.19 89.53,20 | 89.53,20 IC6.10 | IC5.24 154.31,20 | 154.31,20 147.96,20 | IC6.24 95.89,20 | 95.89,20 89.53,20 | 125.09,20 IC7.5 C15.1 C17.1 127.64,30.48 133.03,30.48 135.89,27.62 C14.+ | IC7.19 118.75,20 | 118.75,20 IC7.10 | IC7.24 125.09,20 | 125.09,20 118.75,20 | 127.64,54.93 IC8.5 C19.1 C21.1 125.6,44.9 125.09,44.45 119.38,44.45 116.84,46.99 116.84,48.26 | IC8.19 133.99,54.93 | 133.99,54.93 IC8.10 | IC8.24 127.64,54.93 | 127.64,54.93 133.99,54.93 | 163.19,54.93 IC9.10 | IC9.24 156.84,54.93 | 156.84,54.93 IC9.5 C40.1 C42.1 154.94,44.45 148.59,44.45 146.05,46.99 | IC9.19 163.19,54.93 | 163.19,54.93 156.84,54.93 | 106.68,27.94 C10.+ 109.86,22.73 109.86,17.78 108.58,16.51 v102.87,16.51 | 146.05,46.99 146.05,48.26 | 116.84,48.26 C18.+ 116.84,49.21 113.98,49.21 113.67,49.53 | 151.13,15.24 D2.C | 92.71,15.24 D8.C | D12.C 121.92,15.24 | D4.C 151.13,15.24 | 151.13,15.24 v151.13,16.51 | C4.+ 164.34,25.91 | D10.C 121.92,15.24 | 121.92,15.24 v121.92,16.51 | C14.+ 135.89,25.4 | D6.C 92.71,15.24 | 92.71,15.24 v92.71,16.51 | D18.C 160.02,59.69 | 130.81,59.69 D16.C | D14.C 130.81,59.69 | 130.81,59.69 v130.81,58.42 | D20.C 160.02,59.69 | 160.02,59.69 v160.02,58.42 | 118.11,38.1 135.89,38.1 C14.+ | 161.29,38.1 146.05,38.1 146.05,46.99 | 146.05,48.26 C39.+ | v149.86,58.42 149.86,52.07 146.05,48.26 | v119.7,58.42 119.7,51.12 116.84,48.26 | 106.68,27.94 106.68,35.56 | 67.31,35.56 F5.2 68.45,30.61 69.4,29.66 SJ2.2 | 77.47,35.56 F7.2 78.61,30.61 79.56,29.66 SJ1.2 | 57.15,31.11 F6.2 58.29,30.61 59.24,29.66 SJ3.2
  Top 0.61: v132.08,16.51 137.16,16.51 138.43,17.78 138.43,23.05 C14.+ | v161.29,16.51 166.37,16.51 167.64,17.78 167.64,22.86 165.1,25.4
  Top 1.016: IC1.1 97.08,64.06 | 97.08,64.06 97.16,64.14 | C1.+ 97.03,64.11 97.08,64.06
  Top 1.676: 115.57,40.64 110.49,35.56 106.68,35.56 77.47,35.56 67.31,35.56 59.69,35.56 57.15,33.02 57.15,31.11
  Top 2.54: JP1.2 113.67,69.85 | 113.67,69.85 101.92,69.85 96.84,64.77 | 113.67,69.85 113.67,49.53 113.67,42.55 115.57,40.64 118.11,38.1 161.29,38.1 165.1,34.29 165.1,30.48 C4.+
  Bottom 0.61: v151.13,16.51 v161.29,16.51 | v121.92,16.51 v132.08,16.51 | v92.71,16.51 v102.87,16.51 | v130.81,58.42 v119.7,58.42 | v160.02,58.42 v149.86,58.42
AGND  (via drill 0.5)
  Top 0.305: C48.2 C49.2 171.64,22.56 IC13.3 171.64,23.16 C51.2 v171.64,33.97 | C46.2 C47.2 171.64,51.77 IC12.3 171.64,52.37 C50.2 | ZD4.A 139.06,41.59 v138.43,40.96 134.47,40.96 R31.2 | R37.2 163.68,40.96 167.64,40.96 168.28,41.59 ZD5.A 168.28,42.23 171.64,42.23 | ZD1.A 142.88,33.34 v143.51,33.97 | v143.51,33.97 147.47,33.97 R5.2 | v171.64,33.97 C46.2 | U3.5 50.4,48.02 v48.58,49.85 48.58,51.92 R35.1 | R35.1 48.73,52.54 48.26,52.07 | 48.71,52.05 R35.1 | C44.2 48.77,52.1 R35.1 | C46.2 171.64,42.23 | 171.64,42.23 v171.64,33.97 | v134.94,34.61 121.44,34.61 R10.2 118.26,33.97 114.3,33.97 113.67,33.34 ZD3.A 113.71,32.7 v107.63,32.7 | v105.73,32.7 104.14,34.29 91.44,34.29 90.32,33.17 R8.2 89.05,33.97 85.09,33.97 84.45,33.34 ZD2.A 84.45,32.7 v78.74,32.7 | v53.66,37.47 53.66,32.7 v53.98,32.38 | v136.84,33.97 v143.51,33.97 | v141.29,36.2 v143.51,33.97
  Bottom 0.305: v143.51,33.97 v171.64,33.97 | v138.43,40.96 138.43,39.05 v141.29,36.2 | v105.73,32.7 v107.63,32.7 | v78.74,32.7 78.11,32.07 54.29,32.07 v53.98,32.38 | v53.66,37.47 53.66,42.23 54.61,43.18 54.61,43.81 v48.58,49.85 | v136.84,33.97 135.57,33.97 v134.94,34.61
D1+  (via drill 0.5, 0.6)
  Top 0.305: R29.1 38.42,16.7 C32.1 38.29,18.55 v38.1,18.73 | IC10.12 24.7,35.81 v24.45,35.56
  Bottom 0.305: v38.1,18.73 38.1,24.77 26.99,35.88 24.77,35.88 v24.45,35.56
D1-  (via drill 0.5)
  Top 0.305: R28.1 30.29,20.32 C33.1 v30.16,22.23 | IC10.11 24.97,36.31 v24.45,36.83
  Bottom 0.305: v24.45,36.83 23.5,35.88 23.5,35.24 24.13,34.61 27.3,34.61 37.47,24.45 37.47,23.5 36.2,22.23 v30.16,22.23
GND  (via drill 0.5, 0.6)
  Top 0.305: IC4.13 33.97,16.19 32.87,17.3 R27.1 33.02,17.63 | 27.94,38.68 IC10.7 | IC10.28 30.73,35.31 30.48,35.56 30.48,36.51 30.78,36.81 IC10.31 33.29,36.81 33.62,37.15 33.66,37.47 | IC10.8 27.46,40.99 C9.2 | U3.3 52,48.06 52.64,48.7 52.64,49.47 52.7,49.53 C3.2 | v104.78,47.62 105.09,47.94 105.73,47.94 IC1.6 | 27.94,38.73 27.94,39.69 28.26,40.01 28.57,40.01 28.46,39.89 IC10.6 28.46,36.63 v28.89,36.2
  Bottom 0.305: v109.86,47.62 114.62,47.62 114.94,47.94 | 114.94,55.56 116.4,55.56 C18.-
  Bottom 3.81: 114.94,47.94 114.94,55.56
  other vias: 100.97,56.52 100.97,53.98 100.97,50.16 100.97,47.62 109.86,50.16 109.86,53.98 109.86,56.52 108.58,56.52 107.31,56.52 106.05,56.52 104.78,56.52 103.5,56.52 102.23,56.52 102.23,53.98 103.5,53.98 104.78,53.98 106.05,53.98 107.31,53.98 108.58,53.98 108.58,50.16 108.58,47.62 102.23,47.62 102.23,50.16 104.78,50.16 103.5,50.16 103.5,47.62 107.31,47.62 107.31,50.16 106.05,50.16 106.05,47.62 158.12,20.32 156.84,20.32 155.57,20.32 158.12,21.59 156.84,21.59 155.57,21.59 158.12,22.86 155.57,22.86 156.84,22.86 158.12,24.13 156.84,24.13 155.57,24.13 155.57,25.4 146.69,25.4 144.15,24.13 144.15,22.86 144.15,21.59 144.15,20.32 145.41,20.32 146.69,20.32 146.69,21.59 146.69,22.86 146.69,24.13 145.41,24.13 145.41,22.86 145.41,21.59 153.03,21.27 153.03,22.54 153.03,23.81 153.03,25.08 151.76,25.08 150.5,25.08 149.22,25.08 149.22,23.81 149.22,22.54 149.22,21.27 150.5,21.27 151.76,21.27 151.76,22.54 150.5,22.54 151.76,23.81 150.5,23.81 99.69,20.32 128.91,20.32 123.83,54.61 161.93,49.85 98.42,20.32 97.16,20.32 97.16,21.59 97.16,22.86 97.16,24.13 97.16,25.4 98.42,24.13 99.69,24.13 99.69,22.86 99.69,21.59 98.42,21.59 98.42,22.86 88.27,25.4 88.27,24.13 88.27,22.86 88.27,21.59 88.27,20.32 87,20.32 85.72,20.32 85.72,21.59 85.72,22.86 85.72,24.13 87,24.13 87,22.86 87,21.59 90.81,25.08 92.08,25.08 93.34,25.08 94.61,25.08 94.61,23.81 93.34,23.81 92.08,23.81 90.81,23.81 90.81,22.54 92.08,22.54 93.34,22.54 94.61,22.54 94.61,21.27 93.34,21.27 92.08,21.27 90.81,21.27 127.64,20.32 126.36,20.32 126.36,21.59 127.64,21.59 128.91,21.59 128.91,22.86 127.64,24.13 128.91,24.13 127.64,22.86 126.36,22.86 126.36,24.13 126.36,25.4 117.47,25.4 117.47,24.13 116.2,24.13 114.94,24.13 114.94,22.86 116.2,22.86 117.47,22.86 117.47,21.59 116.2,21.59 114.94,21.59 114.94,20.32 116.2,20.32 117.47,20.32 120.02,21.27 121.28,21.27 122.56,21.27 123.83,21.27 123.83,22.54 123.83,23.81 123.83,25.08 122.56,25.08 121.28,25.08 120.02,25.08 120.02,23.81 120.02,22.54 121.28,22.54 122.56,22.54 122.56,23.81 121.28,23.81 125.09,54.61 126.36,54.61 126.36,53.34 126.36,52.07 126.36,50.8 126.36,49.53 125.09,50.8 123.83,50.8 123.83,52.07 123.83,53.34 125.09,53.34 125.09,52.07 135.25,49.53 135.25,50.8 135.25,52.07 135.25,53.34 135.25,54.61 136.53,54.61 137.79,54.61 137.79,53.34 137.79,52.07 137.79,50.8 136.53,50.8 136.53,52.07 136.53,53.34 128.91,53.66 130.18,53.66 131.44,53.66 132.72,53.66 131.44,52.39 132.72,52.39 130.18,52.39 128.91,52.39 128.91,51.12 130.18,51.12 131.44,51.12 132.72,51.12 128.91,49.85 130.18,49.85 131.44,49.85 132.72,49.85 155.57,49.53 155.57,50.8 155.57,52.07 155.57,53.34 155.57,54.61 154.31,54.61 153.03,54.61 153.03,53.34 153.03,52.07 153.03,50.8 154.31,50.8 154.31,52.07 154.31,53.34 164.47,49.53 164.47,50.8 164.47,52.07 164.47,53.34 164.47,54.61 165.74,54.61 167,54.61 167,53.34 167,52.07 167,50.8 165.74,50.8 165.74,52.07 165.74,53.34 160.66,49.85 159.38,49.85 158.12,49.85 158.12,51.12 158.12,52.39 158.12,53.66 159.38,53.66 160.66,53.66 161.93,53.66 161.93,52.39 161.93,51.12 160.66,51.12 159.38,51.12 159.38,52.39 160.66,52.39 73.34,73.34 114.62,13.97 115.57,13.97 116.52,13.97 83.5,13.97 84.45,13.97 85.41,13.97 83.5,13.02 84.45,13.02 85.41,13.02 116.52,13.02 115.57,13.02 114.62,13.02 129.22,13.02 130.18,13.02 131.13,13.02 131.13,13.97 130.18,13.97 129.22,13.97 143.19,13.97 145.1,13.97 144.15,13.97 144.15,13.02 143.19,13.02 145.1,13.02 158.43,13.02 159.38,13.02 160.34,13.02 160.34,13.97 159.38,13.97 158.43,13.97 101.92,13.02 100.97,13.02 100.01,13.02 100.01,13.97 100.97,13.97 101.92,13.97 44.13,47.31 43.18,47.31 43.18,48.26 44.13,48.26 44.13,49.21 43.18,49.21 62.87,49.53 63.82,49.53 63.82,50.48 62.87,50.48 62.87,51.44 63.82,51.44 84.14,53.34 81.92,47.62 80.96,47.62 80.01,47.62 79.06,47.62 78.11,50.48 78.11,49.53 78.11,48.58 78.11,47.62 26.35,43.18 27.3,43.18 30.8,36.2 27.3,45.09 27.3,44.13 26.35,44.13 28.26,43.18 30.8,35.24 29.84,34.92 29.84,35.88 28.89,35.24 121.28,60.96 122.24,60.96 123.19,60.96 123.19,61.91 122.24,61.91 121.28,61.91 140.65,61.91 138.75,61.91 139.7,61.91 138.75,60.96 139.7,60.96 140.65,60.96 150.18,61.91 151.13,61.91 152.08,61.91 150.18,60.96 151.13,60.96 152.08,60.96 165.42,61.91 166.37,61.91 167.32,61.91 167.32,60.96 166.37,60.96 165.42,60.96 85.41,53.34 85.41,52.07 85.41,50.8 86.68,53.34 86.68,52.07 86.68,50.8 87.95,50.8 89.22,50.8 90.49,50.8 87.95,52.07 87.95,53.34 89.22,53.34 90.49,53.34 89.22,52.07 90.49,52.07 91.76,52.07 93.03,52.07 94.3,52.07 84.14,52.07 82.87,52.07 82.87,50.8 82.87,49.53 82.87,48.26 82.87,46.99 84.14,46.99 84.14,48.26 84.14,49.53 84.14,50.8
  pour Top (isolate 0.254): 50.8,0 177.16,0 177.16,75.88 115.25,75.88 115.25,39.37 111.44,35.56 50.8,35.56
  pour Bottom (isolate 0.254): 50.8,0 177.16,0 177.16,75.88 115.25,75.88 115.25,39.37 111.44,35.56 50.8,35.56
  pour Top (isolate 0.254): 114.62,75.88 0,75.88 0,0 50.16,0 50.16,36.2 111.12,36.2 114.62,39.69
  pour Bottom (isolate 0.254): 114.62,75.88 0,75.88 0,0 50.16,0 50.16,36.2 111.12,36.2 114.62,39.69
ISP-MISO  (via drill 0.5)
  Top 0.305: U3.16 46.51,38.89 ISP1.1 | R4.2 v16.51,58.42
  Bottom 0.305: v16.51,58.42 17.46,58.42 27.94,47.94 35.88,47.94 ISP1.1
ISP-MOSI  (via drill 0.5)
  Top 0.305: ISP1.4 41.91,36.83 41.91,39.37 43.72,41.18 U3.15 | R3.2 v51.44,60.33
  Bottom 0.305: v51.44,60.33 45.09,60.33 40.32,55.56 40.32,46.04 43.18,43.18 45.09,43.18 46.04,42.23 46.04,39.69 46.99,38.73 46.99,37.47 46.35,36.83 44.45,36.83 ISP1.4
ISP-SCK  (via drill 0.5)
  Top 0.305: ISP1.3 44.45,36.83 46.99,36.83 48,37.84 U3.17 | R2.2 v29.21,58.42
  Bottom 0.305: ISP1.3 43.18,39.69 35.56,47.31 27.62,47.31 17.46,57.47 16.19,57.47 15.56,58.1 15.56,58.74 16.19,59.37 28.26,59.37 v29.21,58.42
LATCH  (via drill 0.5)
  Top 0.305: IC2.12 v61.28,73.34 | v74.61,73.34 IC3.12 | U3.14 45.16,41.98 v45.09,41.97
  Bottom 0.305: v61.28,73.34 62.23,74.3 64.77,74.3 | 64.77,74.3 73.66,74.3 v74.61,73.34 | v45.09,41.97 43.12,41.97 39.37,45.72 39.37,55.88 44.45,60.96 50.8,60.96 51.12,61.28 51.75,61.28 64.77,74.3
MISO
  Top 0.305: R4.1 11.91,68.43 ISP2.1 14.61,68.58 23.18,68.58 | 23.18,68.58 33.02,68.58 | 33.02,68.58 41.59,68.58 ISP5.1 | ISP3.1 23.18,68.58 | ISP4.1 33.02,68.58
MOSI  (via drill 0.5)
  Top 0.305: IC2.14 58.74,73.34 57.78,74.3 57.15,74.3 v56.2,73.34 | R3.1 52.87,64.92 v53.02,64.77
  Bottom 0.305: ISP2.4 17.14,66.04 25.72,66.04 | 25.72,66.04 35.56,66.04 | 35.56,66.04 44.13,66.04 ISP5.4 | ISP3.4 25.72,66.04 | ISP4.4 35.56,66.04 | v56.2,73.34 52.39,73.34 46.35,67.31 ISP5.4 | v53.02,64.77 47.94,64.77 ISP5.4
N$1
  Top 1.016: IC1.2 92.1,53.77 L18.1 85.55,56.97 83,54.42 D1.C
N$2
  Top 0.305: U3.8 45.75,47.47 Y1.3
N$3
  Top 0.61: IC6.14 84.45,25.4 | 84.45,25.4 IC6.15 84.45,17.14 85.09,16.51 88.27,16.51 | IC6.12 87,26.04 86.36,25.4 84.45,25.4 | IC6.21 IC6.20 90.81,17.14 90.17,16.51 88.27,16.51 | IC6.18 88.27,16.51 | D9.C D8.A | D8.A 88.27,15.29 88.27,16.51 | D8.A 90.86,12.7 C12.2 91.31,11.56 96.52,6.35 JP3.1
N$4
  Top 0.305: U3.7 48.8,48.35 47.25,49.9 Y1.1
N$5
  Top 0.61: IC6.1 100.97,25.4 | 100.97,25.4 IC6.28 100.97,17.14 100.33,16.51 97.16,16.51 | IC6.3 98.42,26.04 99.06,25.4 100.97,25.4 | IC6.22 IC6.23 94.61,17.14 95.25,16.51 97.16,16.51 | IC6.25 97.16,16.51 | D7.C D6.A | D6.A 97.16,15.29 97.16,16.51 | D6.A 94.56,12.7 C12.1 94.11,11.62 96.84,8.89 115.57,8.89 116.85,7.61 JP3.2
N$6  (via drill 0.5)
  Top 0.305: IC3.14 v72.07,73.34 | v65.09,73.34 IC2.9
  Bottom 0.305: v72.07,73.34 v65.09,73.34
N$7
  Top 0.305: R13.1 29.84,44.7 U$1.A 29.98,44.08 C9.1 30.46,40.79 IC10.2
N$8
  Top 0.61: 113.67,25.15 IC7.15 113.67,17.14 114.3,16.51 117.47,16.51 | 113.67,25.15 IC7.14 | IC7.21 IC7.20 120.02,17.14 119.38,16.51 117.47,16.51 | IC7.18 117.47,16.51 | IC7.12 116.27,25.78 115.63,25.15 113.67,25.15 | D13.C D12.A | D12.A 117.47,15.29 117.47,16.51 | D12.A 120.07,12.7 C16.2 120.52,6.54 JP4.1
N$9
  Top 0.61: IC7.1 130.18,25.15 | 130.18,25.15 IC7.28 130.18,17.14 129.54,16.51 126.36,16.51 | IC7.22 IC7.23 123.83,17.14 124.46,16.51 126.36,16.51 | IC7.25 126.36,16.51 | IC7.3 127.64,25.78 128.27,25.15 130.18,25.15 | D11.C D10.A | D10.A 126.36,15.29 126.36,16.51 | D10.A 123.77,12.7 C16.1 123.32,6.86 JP4.2
N$10
  Top 0.61: IC8.14 139.06,49.53 | 139.06,49.53 IC8.15 139.06,57.78 138.43,58.42 135.25,58.42 | IC8.12 136.53,48.9 137.16,49.53 139.06,49.53 | IC8.21 IC8.20 132.72,57.78 133.35,58.42 135.25,58.42 | IC8.18 135.25,58.42 | D17.C D16.A | D16.A 135.25,59.63 135.25,58.42 | D16.A 132.66,62.23 C20.2 132.21,69.66 JP5.1
N$11
  Top 0.61: IC8.1 122.56,49.53 | 122.56,49.53 IC8.28 122.56,57.78 123.19,58.42 126.36,58.42 | IC8.3 125.09,48.9 124.46,49.53 122.56,49.53 | IC8.22 IC8.23 128.91,57.78 128.27,58.42 126.36,58.42 | IC8.25 126.36,58.42 | D14.A 125.09,59.69 | D14.A D15.C | D14.A 126.36,59.63 126.36,58.42 | D14.A 128.96,62.23 C20.1 129.54,62.23 129.54,69.21 JP5.2
N$12
  Top 0.61: IC9.14 168.28,49.53 | 168.28,49.53 IC9.15 168.28,57.78 167.64,58.42 164.47,58.42 | IC9.21 IC9.20 161.93,57.78 162.56,58.42 164.47,58.42 | IC9.18 164.47,58.42 | IC9.12 165.74,48.9 166.37,49.53 168.28,49.53 | D21.C D20.A | D20.A 164.47,59.63 164.47,58.42 | D20.A 161.87,62.23 C41.2 161.42,63.37 154.94,69.85 JP6.1
N$13
  Top 0.61: 146.69,16.51 143.51,16.51 142.88,17.14 IC5.15 142.88,25.4 | IC5.21 IC5.20 149.22,17.14 148.59,16.51 146.69,16.51 | IC5.18 146.69,16.51 | 142.88,25.4 IC5.14 | IC5.12 145.41,26.04 144.78,25.4 142.88,25.4 | D5.C D4.A | D4.A 146.69,15.29 146.69,16.51 | D4.A 149.28,12.7 C6.2 149.73,11.62 147,8.89 128.27,8.89 127.32,7.94 JP2.1
N$14
  Top 0.61: IC9.1 151.76,49.53 | 151.76,49.53 IC9.28 151.76,57.78 152.4,58.42 155.57,58.42 | IC9.22 IC9.23 158.12,57.78 157.48,58.42 155.57,58.42 | IC9.25 155.57,58.42 | IC9.3 154.31,48.9 153.67,49.53 151.76,49.53 | D19.C D18.A | D18.A 155.57,59.63 155.57,58.42 | D18.A 158.17,62.23 C41.1 158.62,63.31 154.62,67.31 137.16,67.31 135.88,68.59 JP6.2
N$15
  Top 0.305: IC3.7 77.15,66.04 77.79,65.41 R57.9
N$16
  Top 0.305: IC4.2 32.7,8.12 C43.2
N$17
  Top 0.305: IC3.6 75.88,66.04 76.52,65.41 R57.10
N$18
  Top 0.305: IC3.5 74.61,66.04 75.25,65.41 R57.11
N$19
  Top 0.305: IC10.1 32.89,40.59 C24.1 32.89,43.44 U$1.C 33.02,45.33 R12.1 33.19,47.47 35.88,50.16 R11.1
N$21
  Top 0.305: R15.1 R21.1 12.77,19.05 U$2.A 7.68,18.34 JP17.2
N$22
  Top 0.305: IC10.30 33.45,36.31 34.54,37.4 Y2.3
N$23
  Top 0.305: IC10.29 33.41,35.81 34.22,34.99 Y2.1
N$24
  Top 0.305: R20.1 R14.1 12.14,13.97 U$2.C 8.48,14.04 JP17.3
N$25
  Top 0.305: R19.1 R22.1 13.26,29.84 U$3.C 9.12,28.65 JP13.3
N$26  (via drill 0.5)
  Top 0.305: R16.2 18.75,50.99 C30.1 22.67,50.99 v22.86,50.8 | IC10.16 24.23,33.81 22.86,35.18 22.86,37.78 v23.5,38.42
  Bottom 0.305: v23.5,38.42 24.77,39.69 24.77,48.9 v22.86,50.8
N$27
  Top 0.305: R17.2 18.75,48.07 C29.1 24.64,48.07 25.4,47.31 25.4,39.05 23.5,37.15 23.5,35.24 24.43,34.31 IC10.15
N$28  (via drill 0.5)
  Top 0.305: R18.2 18.75,35.11 C28.1 22.73,33.66 v22.86,33.66 | IC10.20 28.96,30.86 v27.94,29.84
  Bottom 0.305: v27.94,29.84 26.67,29.84 v22.86,33.66
N$29
  Top 0.305: R19.2 18.75,32.2 C27.1 24.32,32.2 25.72,30.8 27.94,30.8 28.46,31.32 IC10.19
N$30  (via drill 0.5)
  Top 0.305: R20.2 18.75,16.32 C25.1 22.67,16.32 v29.21,22.86 | IC10.23 30.46,26.65 v29.21,25.4
  Bottom 0.305: v29.21,25.4 v29.21,22.86
N$31
  Top 0.305: R21.2 18.75,19.24 C26.1 24.32,19.24 30.96,25.88 IC10.24
N$32
  Top 0.305: R23.1 R18.1 14.04,34.92 U$3.A 8.32,32.95 JP13.2
N$33
  Top 0.305: R17.1 R24.1 13.26,45.72 U$4.C 8.48,44.52 JP11.3
N$34
  Top 0.305: R25.1 R16.1 14.04,50.8 U$4.A 7.68,48.82 JP11.2
N$35
  Top 0.305: F1.2 9.19,9.84 JP17.4
N$36
  Top 0.305: F2.2 8.55,25.72 JP13.4
N$37
  Top 0.305: F3.2 7.92,41.59 JP11.4
N$38
  Top 0.305: IC4.10 35.32,15.48 | 35.32,15.48 35.24,15.56 | 35.32,15.48 IC4.11 35.24,13.97 33.34,12.06 IC4.3 33.34,8.44 C23.1
N$39
  Top 0.305: R28.2 R27.2 36.51,16.98 IC4.9
N$40
  Top 0.305: R30.2 R29.2 36.99,11.28 36.51,10.79 IC4.8
N$41
  Top 0.305: L2.P$2 F3.1
N$42
  Top 0.305: L3.P$2 F2.1
N$43
  Top 0.61: JP14.1 72.07,9.38 Q1.3
N$44
  Top 0.305: JP8.1 5.71,61.28 10.79,56.2 24.77,56.2 29.21,51.75 31.58,51.75 R12.2
N$45
  Top 0.305: JP8.2 7.63,58.41 10.48,55.56 24.6,55.56 R13.2
N$46
  Top 0.305: R34.1 83.99,41.11 83.82,41.27 LED3.C 83.5,41.27
N$47
  Top 0.61: JP15.1 65.09,10.65 Q2.3
N$48
  Top 0.61: Q3.3 53.98,10.79 JP16.1
N$49
  Top 0.305: L4.P$2 F1.1
N$50
  Top 0.61: JP16.2 61.2,7.07 U$8.C 61.2,19.32 C55.+ F6.1 58.55,27.81 59.5,28.76 SJ3.1
N$51
  Top 0.305: R32.1 18.26,59.84 ISP2.5
N$52
  Top 0.305: ISP3.5 23.18,64.45 26.67,60.96 28.42,60.96 R33.1
N$53
  Top 0.305: ISP4.5 33.02,62.71 R38.1
N$54
  Top 0.61: JP15.2 68.59,9.92 U$7.C 71.36,19.32 C54.+ F5.1 68.71,27.81 69.66,28.76 SJ2.1
N$55
  Top 0.61: JP14.2 75.57,6.75 U$6.C 81.53,19.32 C53.+ F7.1 78.87,27.81 79.82,28.76 SJ1.1
N$56
  Top 0.305: IC3.4 73.34,66.04 73.98,65.41 R57.12
N$58
  Top 0.305: R39.1 43.98,63.65 ISP5.5
N$59
  Top 0.61: 155.57,16.51 158.75,16.51 159.38,17.14 IC5.28 159.38,25.4 | IC5.25 155.57,16.51 | IC5.22 IC5.23 153.03,17.14 153.67,16.51 155.57,16.51 | IC5.1 159.38,25.4 | IC5.3 156.84,26.04 157.48,25.4 159.38,25.4 | D3.C D2.A | D2.A 155.57,15.29 155.57,16.51 | D2.A 152.98,12.7 C6.1 152.53,11.56 147.32,6.35 JP2.2
N$60
  Top 0.305: IC3.3 72.07,66.04 72.71,65.41 R57.13
N$61
  Top 0.305: IC3.2 70.8,66.04 70.17,65.41 R57.15
N$62
  Top 0.305: IC3.1 69.53,66.04 68.9,65.41 R57.16
N$63  (via drill 0.5)
  Top 0.305: IC3.15 70.8,72.71 70.17,73.34 69.22,73.34 v68.26,72.39 | v71.44,67.63 R57.14
  Bottom 0.305: v68.26,72.39 68.26,70.8 v71.44,67.63
N$64
  Top 0.305: IC2.7 63.82,66.04 64.45,65.41 R41.9
N$65
  Top 0.305: IC2.6 62.55,66.04 63.18,65.41 R41.10
N$66
  Top 0.305: IC2.5 61.28,66.04 61.91,65.41 R41.11
N$67
  Top 0.305: IC2.4 60.01,66.04 60.64,65.41 R41.12
N$68
  Top 0.305: IC2.3 58.74,66.04 59.37,65.41 R41.13
N$69
  Top 0.305: IC2.2 57.47,66.04 58.1,65.41 R41.14
N$70
  Top 0.305: IC2.1 56.2,66.04 55.56,65.41 R41.16 55.56,64.14
N$71  (via drill 0.5)
  Top 0.305: v57.47,73.34 IC2.15 | R41.15 v56.83,67.63
  Bottom 0.305: v56.83,67.63 56.83,72.71 v57.47,73.34
N$76
  Top 0.305: IC5.9 149.22,29.68 R6.2
N$77
  Top 0.305: IC7.9 120.02,29.68 R7.2
N$78
  Top 0.305: IC6.9 90.81,29.68 R9.2
N$79
  Top 0.305: IC9.9 161.93,45.25 R36.2
N$80
  Top 0.305: IC8.9 132.72,45.25 R26.2
RXD  (via drill 0.5)
  Top 0.305: IC4.1 v32.07,12.06 | U3.30 55.02,44.45 53.34,44.45 52.7,43.81 v52.7,42.55
  Bottom 0.305: v32.07,12.06 33.66,12.06 40.01,18.41 40.01,33.02 40.64,33.66 46.67,33.66 48.26,35.24 48.26,41.59 49.21,42.55 v52.7,42.55
SCK  (via drill 0.5)
  Top 0.305: ISP2.3 14.61,66.04 19.05,66.04 | 19.05,66.04 23.18,66.04 | 23.18,66.04 33.02,66.04 | 33.02,66.04 41.59,66.04 ISP5.3 | ISP3.3 23.18,66.04 | ISP4.3 33.02,66.04 | IC2.11 v62.55,73.34 63.5,74.3 74.93,74.3 75.88,73.34 IC3.11 | R2.1 24.13,58.42 19.05,63.5 19.05,66.04
  Bottom 0.305: ISP5.3 44.13,68.58 46.67,68.58 52.39,74.3 59.05,74.3 60.96,72.39 61.59,72.39 v62.55,73.34
SW0  (via drill 0.5)
  Top 0.305: Q3.1 54.93,32.38 v55.56,33.02 | R57.2 70.17,57.78 72.71,55.24 72.71,41.91 v71.12,40.32
  Bottom 0.305: v55.56,33.02 63.82,33.02 v71.12,40.32
SW1  (via drill 0.5)
  Top 0.305: Q2.1 v65.08,33.02 | R57.4 72.71,56.2 73.34,55.56 73.34,40.64 v72.07,39.37
  Bottom 0.305: v72.07,39.37 65.72,33.02 v65.09,33.02 v65.08,33.02
SW2  (via drill 0.5)
  Top 0.305: Q1.1 v75.25,33.02 | v73.03,38.42 73.98,39.37 R57.5
  Bottom 0.305: v75.25,33.02 75.25,36.2 v73.03,38.42
SW3
  Top 0.305: R57.6 75.25,60.01 76.52,61.28 81.6,61.28 87,66.67 JP12.1
SW4
  Top 0.305: R57.7 76.52,60.01 77.15,60.64 81.92,60.64 89.53,68.26 JP12.2
SW5
  Top 0.305: R57.8 77.79,59.05 81.28,59.05 92.08,69.85 JP12.3
TEMP0  (via drill 0.5)
  Top 0.305: U3.28 57.23,42.78 58.1,41.91 66.99,41.91 70.17,45.09 70.17,53.02 71.44,54.29 71.44,55.56 69.53,57.47 68.26,57.47 67.31,58.42 v67.31,66.04 | 174.31,55.38 C50.1 174.31,55.24 | IC12.2 174.31,53.02 174.31,55.24 | 174.31,55.24 174.31,56.83 165.74,65.41 v160.97,65.41 | v117.47,66.67 v120.02,66.67 | v133.99,65.41 v154.94,65.41
  Bottom 0.305: v67.31,66.04 67.94,65.41 116.52,65.72 v117.47,66.67 | v120.02,66.67 121.28,65.41 v133.99,65.41 | v154.94,65.41 v160.97,65.41
TEMP1  (via drill 0.5)
  Top 0.305: IC13.2 174.44,24.11 C51.1 174.44,26.86 v173.04,28.26 | U3.19 49.6,37.71 v49.85,37.47 | v162.88,26.35 v162.88,19.05
  Bottom 0.305: v49.85,37.47 49.85,10.79 51.75,8.89 161.29,8.89 162.88,10.48 v162.88,19.05 | v162.88,26.35 162.88,27.62 163.51,28.26 v173.04,28.26
TXD  (via drill 0.5)
  Top 0.305: IC4.4 | U3.31 55,45.09 53.02,45.09 51.75,43.81 v51.75,41.59 | IC4.4 33.97,11.11 v34.29,11.43
  Bottom 0.305: v51.75,41.59 49.53,41.59 48.9,40.96 48.9,34.92 46.99,33.02 41.27,33.02 40.64,32.38 40.64,17.78 v34.29,11.43

## Text on the board
_tsilk: SPI4 | SPI3 | SPI2 | SPI1 | Gnd +12V | Motor 4 | Motor 3 | Digital Out | Upstream | USB | - + | GND + - +5V | RST | GND + - +5V | GND + - +5V | Dnstream | USB | WWU Marine Technology Club/SME | 2014 ROV Motherboard | Jeremy Ruhland | GND DC0 | GND DC1 | GND DC2 | Motor 0 | Motor 1 | Motor 2